# Altium PCB E17-15-Charge_Cart.PcbDoc
Units mil, origin at the board's own origin, x right, y up, seen from the top; angles counter-clockwise.
Board outline 3970 x 3255 mil, 2 copper layers (Top Layer, Bottom Layer); 47 components, 42 nets, 237 pads, 4 vias.
Unrouted connection lines stored in the file: 119.
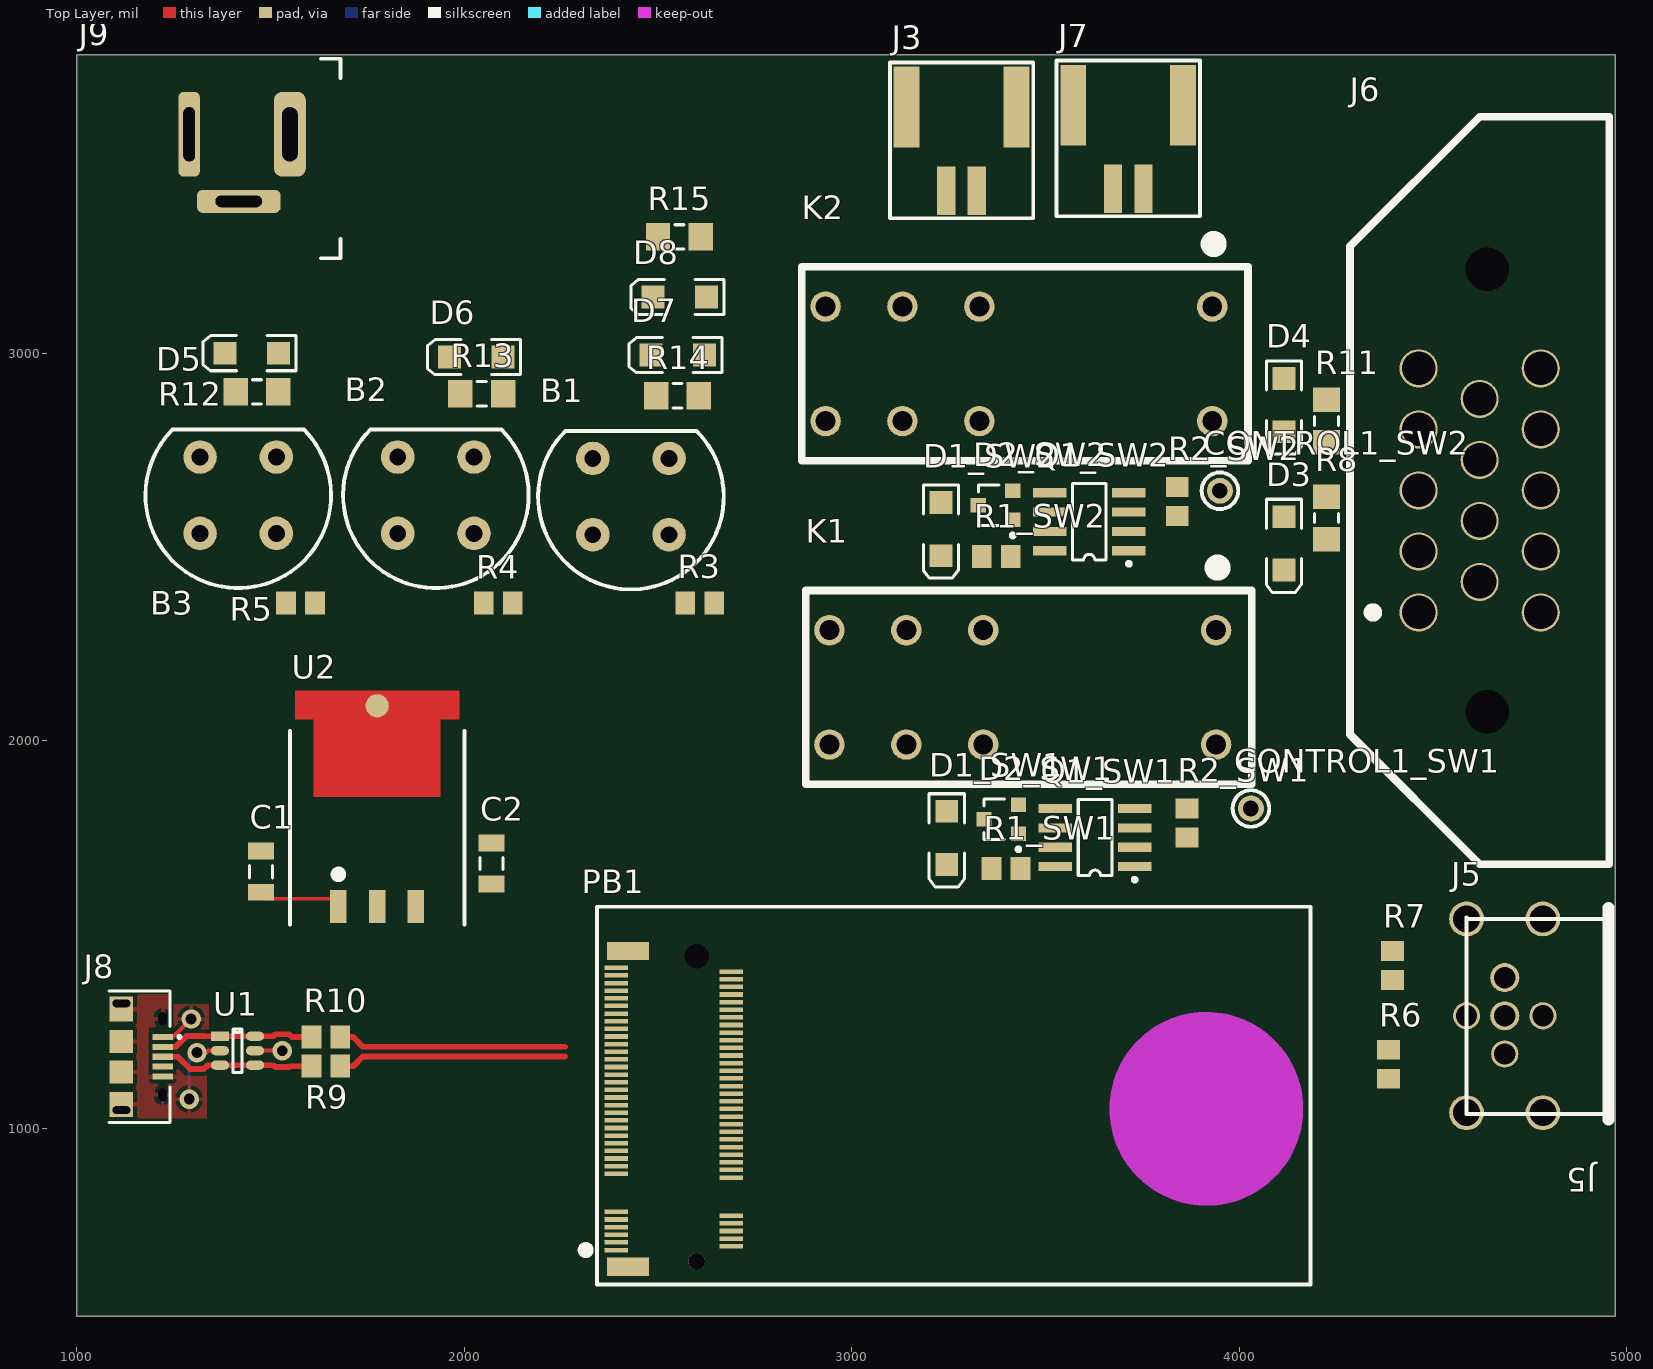
[diagram p0: Top Layer view]
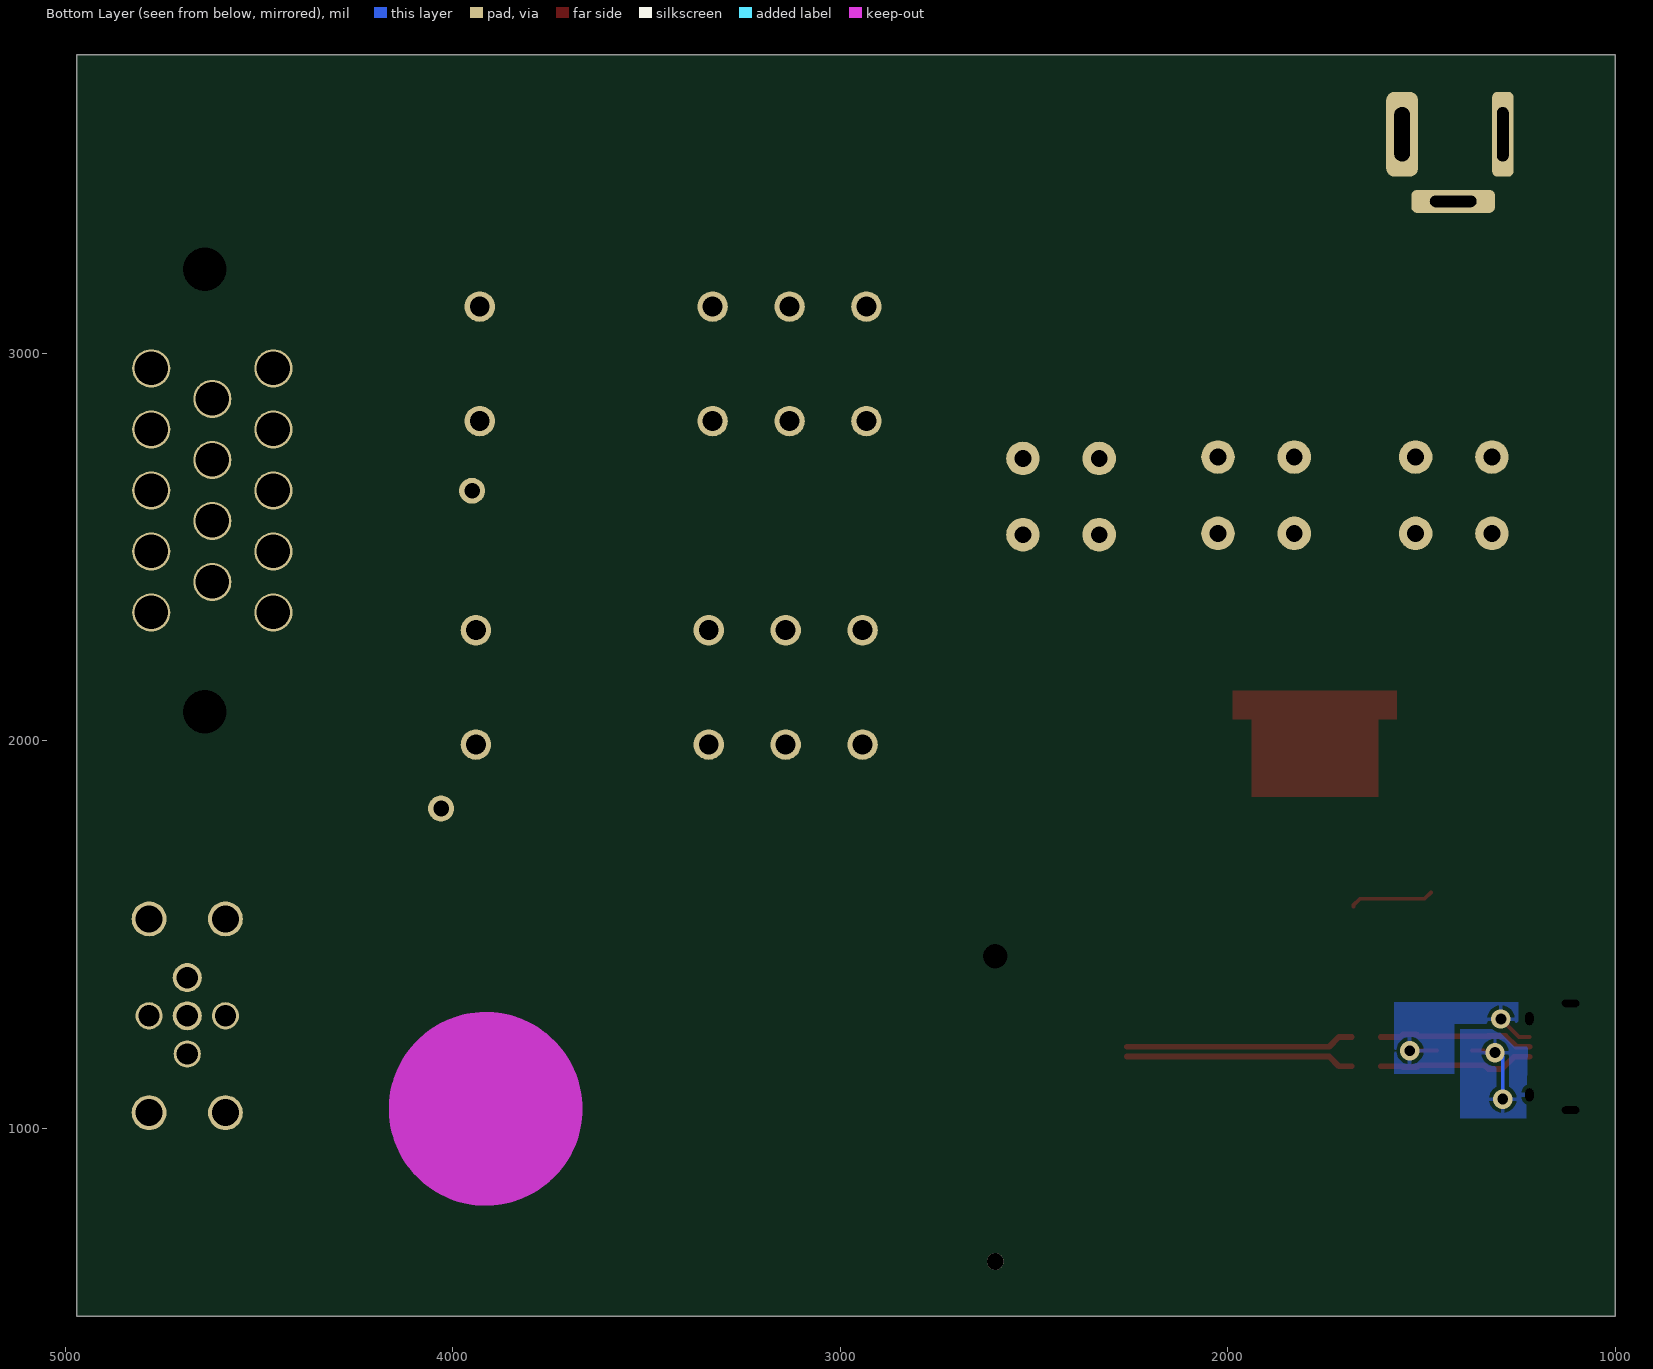
[diagram p1: Bottom Layer view, seen from below]

## Layer stack, top to bottom
Top Solder: solder mask 0.4, Solder Resist, Dk 3.5
Top Layer: signal copper 1.4
Dielectric 1: dielectric 12.6, FR-4, Dk 4.8
Bottom Layer: signal copper 1.4
Bottom Solder: solder mask 0.4, Solder Resist, Dk 3.5

## Board outline
1000,515 4970,515 4970,3770 1000,3770

## Design rules (kind name [scope] priority, off if disabled: settings)
Clearance [All] p1: gap=10 ignorepadtopadclearanceinfootprint=FALSE except(0: Arc-Hole Track-Hole SMDPad-Hole THPad-Hole Via-Hole Fill-Hole Poly-Hole Region-Hole Text-Hole)
DiffPairsRouting [All] p1: maxlimit=10 minlimit=10 mostfreqgap=10 toplayer_minwidth=15 toplayer_maxwidth=15 toplayer_prefwidth=15 bottomlayer_minwidth=15 bottomlayer_maxwidth=15 bottomlayer_prefwidth=15 maxuncoupledlength=500
PolygonConnect [All] p1: connectstyle=Relief reliefconductorwidth=10 reliefentries=4 polygonreliefangle="90 Angle" airgapwidth=10
RoomDefinition U_E17-15-POWER-DIST [InComponentClass('U_E17-15-POWER-DIST')] p1: confinementstyle=ConfineIn formatcopy=TRUE lockcomponents=FALSE outline 5015,8005 5635,8005 5635,9290 5015,9290
RoomDefinition TSAL_LED [InComponentClass('TSAL_LED')] p2: confinementstyle=ConfineIn formatcopy=TRUE lockcomponents=FALSE outline 5015,7595 5350,7595 5350,7955 5015,7955
RoomDefinition SW2 [InComponentClass('SW2')] p3: confinementstyle=ConfineIn formatcopy=TRUE lockcomponents=FALSE outline 1945,4022.4 4690,4022.4 4690,4442.4 1945,4442.4
RoomDefinition SW1 [InComponentClass('SW1')] p4: confinementstyle=ConfineIn formatcopy=TRUE lockcomponents=FALSE outline 5015,9345 7640,9345 7640,9765 5015,9765
RoomDefinition MCU [InComponentClass('MCU')] p5: confinementstyle=ConfineIn formatcopy=TRUE lockcomponents=FALSE outline 5015,5535 6420,5535 6420,7545 5015,7545
RoomDefinition IMD_LED [InComponentClass('IMD_LED')] p6: confinementstyle=ConfineIn formatcopy=TRUE lockcomponents=FALSE outline 5015,5125 5320,5125 5320,5485 5015,5485
RoomDefinition "Human Interface" [InComponentClass('Human Interface')] p7: confinementstyle=ConfineIn formatcopy=TRUE lockcomponents=FALSE outline 5015,4505 9140,4505 9140,5075 5015,5075
RoomDefinition CONN [InComponentClass('CONN')] p8: confinementstyle=ConfineIn formatcopy=TRUE lockcomponents=FALSE outline 5015,2395 10250,2395 10250,4455 5015,4455
RoomDefinition CH_SW [InComponentClass('CH_SW')] p9: confinementstyle=ConfineIn formatcopy=TRUE lockcomponents=FALSE outline 5015,1060 5635,1060 5635,2345 5015,2345
RoutingVias [All] p1: holewidth=28 width=50 viastyle="Through Hole" minholewidth=28 minwidth=50 maxholewidth=28 maxwidth=50
SolderMaskExpansion [All] p1: expansion=4
Width [All] p1: maxlimit=10 minlimit=10 preferedwidth=10
29 further rules are at their usual default settings.

## Classes and differential pairs
component class CH_SW: K1
component class CONN: C1 C2 J5 J6 J7 J8 J9 R6 R7 U1 U2
component class "Human Interface": B1 B2 B3 D5 D6 D7 D8 J3 R3 R4 R5 R12 R13 R14 R15
component class IMD_LED: D3 R8
component class MCU: PB1 R9 R10
component class SW1: CONTROL1_SW1 D1_SW1 D2_SW1 Q1_SW1 R1_SW1 R2_SW1
component class SW2: CONTROL1_SW2 D1_SW2 D2_SW2 Q1_SW2 R1_SW2 R2_SW2
component class TSAL_LED: D4 R11
component class U_E17-15-POWER-DIST: K2
channel class E17-04-INDUCTIVE_LOAD_SWITCH: SW1 SW2
differential pair USB_R: +USB_R_P -USB_R_N
differential pair CAN: +CAN_P -CAN_N
differential pair USB: +USB_P -USB_N

## Components (designator, comment, footprint, x,y, rotation, side; value= is the part's Value field where it differs from the comment)
B1 "MomentaryButton" MomentaryButton 2430,2630 r180 top
B2 "MomentaryButton" MomentaryButton 1926.57,2633.43 r180 top
B3 "MomentaryButton" MomentaryButton 1416.57,2633.43 r180 top
C1 "Cap Semi" C1206 1475,1661.85 r270 top value=470nF
C2 "Cap Semi" C1206 2070,1683.15 r270 top value=33uF
CONTROL1_SW1 "Test Point" "TEST POINT 5000K" 4030,1825 r90 top (schematic designator CONTROL1)
CONTROL1_SW2 "Test Point" "TEST POINT 5000K" 3950,2645 r90 top (schematic designator CONTROL1)
D1_SW1 "OVS5MBBCR4" OVS5MBBCR4 3245,1748.9 r270 top (schematic designator D1)
D1_SW2 "OVS5MBBCR4" OVS5MBBCR4 3230,2546.1 r270 top (schematic designator D1)
D2_SW1 "PMEG4010ET" SOT23-3 3385.71,1797.4 r90 top (schematic designator D2)
D2_SW2 "PMEG4010ET" SOT23-3 3370.71,2607.4 r90 top (schematic designator D2)
D3 "OVS5MBBCR4" OVS5MBBCR4 4115,2508.9 r270 top
D4 "OVS5MABCR4" OVS5MABCR4 4115,2866.1 r270 top
D5 "OVS5MABCR4" OVS5MABCR4 1451.1,3000 r180 top
D6 "OVS5MABCR4" OVS5MABCR4 2031.1,2990 r180 top
D7 "OVS5MABCR4" OVS5MABCR4 2551.1,2995 r180 top
D8 "OVS5MABCR4" OVS5MABCR4 2556.1,3145 r180 top
J3 "J_5023520200" MOLEX_DURACLIK_2 3283.27,3419.25 r0 top
J5 "MOLEX 84864-9003" "MOLEX 84864-9003" 4685,1290 r270 top
J6 "TE-776267-1" TE-776267-1 4462.83,2330.91 r90 top
J7 "J_5023520200" MOLEX_DURACLIK_2 3713.27,3424.25 r0 top
J8 "10118194-0001LF" 10118194-0001LF 1221.3,1184.37 r270 top
J9 "" EJ805A 1290,3565 r270 top
K1 "" TE-7-1393243-5 3940,1990 r180 top
K2 "TE-1393240-3" TE-7-1393243-5 3930,2825 r180 top
PB1 "ProcBoardRev2" PROC_BOARD 3081.03,685.51 r90 top
Q1_SW1 "DMS3015SSS" SOIC-8-150 3627.64,1750 r90 top (schematic designator Q1)
Q1_SW2 "DMS3015SSS" SOIC-8-150 3612.64,2565 r90 top (schematic designator Q1)
R1_SW1 "Res" 2012[0805] 3397.6,1670 r180 top value=1K (schematic designator R1)
R1_SW2 "Res" 2012[0805] 3372.6,2475 r180 top value=1K (schematic designator R1)
R2_SW1 "Res" 2012[0805] 3865,1787.4 r90 top value=10K (schematic designator R2)
R2_SW2 "Res" 2012[0805] 3840,2617.4 r90 top value=10K (schematic designator R2)
R3 "Res" 2012[0805] 2607.6,2355 r180 top value=1K
R4 "Res" 2012[0805] 2087.6,2355 r0 top value=1K
R5 "Res" 2012[0805] 1577.4,2355 r0 top value=1K
R6 "Res" 2012[0805] 4385,1165 r270 top value=1K
R7 "Res" 2012[0805] 4395,1420 r270 top value=0
R8 "Res" 3216[1206] 4225,2574.88 r90 top value=1K
R9 "Res" 2012[0805] 1642.6,1160 r180 top value=18
R10 "Res" 2012[0805] 1642.6,1235 r180 top value=18
R11 "Res" 3216[1206] 4225,2825.12 r90 top value=1K
R12 "Res" 3216[1206] 1464.88,2900 r0 top value=1K
R13 "Res" 3216[1206] 2044.88,2895 r0 top value=1K
R14 "Res" 3216[1206] 2550.12,2890 r0 top value=1K
R15 "Res" 3216[1206] 2555,3300 r0 top value=1K
U1 "" SOP6 1369.45,1237.4 r0 top
U2 "LM3940" TO-263-3 1775,2130 r270 top

## Footprints (in the part's own frame and the unit in brackets; to place one, negate y for a bottom-side part, rotate by r counter-clockwise, add the part's x,y. Pads: shape width x height; smd on the part's side, far side on the other; paste and mask are expansions set on the pad)
2012[0805] [mm] "Chip Resistor; Body 2.0 x 1.3 mm (LxW typ)"
  rect 1.3x1.5 smd: 1(-0.95,0) 2(0.95,0)
  body extent -0.97,-0.61 1.03,0.64, height 0.77
3216[1206] [mm] "Chip Resistor; Body 3.2 x 1.6 mm (LxW typ)"
  rect 1.6x1.8 smd: 1(-1.4,0) 2(1.4,0)
  silkscreen extent -0.3,-0.8 0.3,0.8, body extent -1.6,-0.79 1.6,0.81, height 1
10118194-0001LF [mm] "CONN USB MICRO B RECPT SMT R/A"
  rect 0.4x1.35 smd: 1(-1.3,0) 2(-0.65,0) 3(0,0) 4(0.65,0) 5(1.3,0)
  round 0 hole 0.5 slot 1.15 at 90 deg: 5(-3.5,-2.7) 5(3.5,-2.7)
  rect 1.645x1.55 smd: 5(-3.123,-2.7) 5(3.122,-2.7)
  round 0 hole 0.55 slot 0.85 at 0 deg: 5(-2.5,0) 5(2.5,0)
  rect 1.5x1.55 smd: 5(-1,-2.7) 5(1,-2.7)
  silkscreen extent -4.3,-3.5 4.3,1.2, body extent -4.02,-5.4 4.03,0.18, height 2.68
C1206 [mm] "Chip Capacitor, Body 3.2x1.6mm, IPC High Density"
  rect 1.1x1.7 smd: 1(-1.35,0) 2(1.35,0)
  silkscreen extent -0.4,-0.75 0.4,0.75, body extent -1.7,-0.9 1.7,0.9, height 1.3
EJ805A [mm] "CONN PWR JACK 2.1X5.5MM SOLDER"
  rrect50% 5.56x2.08 hole 1.02 slot 3.56 at 0 deg: 1(0,6.6)
  rrect50% 5.56x1.4 hole 0.76 slot 3.56 at 0 deg: 2(0,0)
  rrect50% 1.5x5.5 hole 0.76 slot 3.05 at 90 deg: 3(4.4,3.25)
  silkscreen extent -4.95,8.64 8.13,9.91, body extent -4.4,-7.49 7.37,9.27, height 10.85
"MOLEX 84864-9003" [mil]
  round 70 hole 55: 1(0,98.5) 3(0,-98.5) 4(98.5,0)
  round 75 hole 55: 2(-98.5,0) 5(0,0)
  round 90 hole 70: 6(250,98.5) 7(250,-98.5) 8(-250,98.5) 9(-250,-98.5)
  silkscreen extent -279,-99 268,268, body extent -299,-148 299,452, height 710
MOLEX_DURACLIK_2 [mm] "2 Positions Header, Shrouded Connector 0.079\" (2.00mm) Surface Mount, Right Angle Tin"
  rect 1.7x5.3 smd: 0(-3.6,5.48) 0(3.6,5.48)
  rect 1.2x3.2 smd: 1(-1,0) 2(1,0)
  silkscreen extent -4.7,-1.8 4.7,8.4, body extent -4,-0.89 4,8.51, height 6.38
MomentaryButton [mm]
  round 2.2 hole 1.1: 1(2.5,2.5) 2(2.5,-2.5) 3(-2.5,-2.5) 4(-2.5,2.5)
  silkscreen extent -6.08,-4.3 6.08,6.08, body extent -6,-5.4 6,6, height 14.3
OVS5MABCR4 [mm] "SMT LED; 2 Flat Leads; AMBER"
  rect 1.5x1.5 smd: 1(-1.75,0) 2(1.75,0)
  silkscreen extent -2.9,-1.15 3.2,1.15, body extent -1.75,-1.4 1.75,1.4, height 1.6
OVS5MBBCR4 [mm] "SMT LED; 2 Flat Leads; BLUE"
  rect 1.5x1.5 smd: 1(-1.75,0) 2(1.75,0)
  silkscreen extent -2.9,-1.15 3.2,1.15, body extent -1.75,-1.4 1.75,1.4, height 1.6
PROC_BOARD [mm]
  rect 1.2x2.75 smd: 0(-1.1,16.725) 0(19.6,16.725)
  round 1.1 hole 1.1 unplated paste+0: 0(-0.75,12.225)
  round 0 hole 6.35 unplated: 0(9.258,-21.183)
  round 1.524 hole 1.6 unplated: 0(19.25,12.225)
  rect 0.3x1.55 smd: 1(0,17.5) 2(0.25,9.95) 3(0.5,17.5) 4(0.75,9.95) 5(1,17.5) 6(1.25,9.95) 7(1.5,17.5) 8(1.75,9.95) 9(2,17.5) 10(2.25,9.95) 11(2.5,17.5) 12(4.75,9.95) 13(5,17.5) 14(5.25,9.95) 15(5.5,17.5) 16(5.75,9.95) 17(6,17.5) 18(6.25,9.95) 19(6.5,17.5) 20(6.75,9.95) 21(7,17.5) 22(7.25,9.95) 23(7.5,17.5) 24(7.75,9.95) 25(8,17.5) 26(8.25,9.95) 27(8.5,17.5) 28(8.75,9.95) 29(9,17.5) 30(9.25,9.95) 31(9.5,17.5) 32(9.75,9.95) 33(10,17.5) 34(10.25,9.95) 35(10.5,17.5) 36(10.75,9.95) 37(11,17.5) 38(11.25,9.95) 39(11.5,17.5) 40(11.75,9.95) 41(12,17.5) 42(12.25,9.95) 43(12.5,17.5) 44(12.75,9.95) 45(13,17.5) 46(13.25,9.95) 47(13.5,17.5) 48(13.75,9.95) 49(14,17.5) 50(14.25,9.95) 51(14.5,17.5) 52(14.75,9.95) 53(15,17.5) 54(15.25,9.95) 55(15.5,17.5) 56(15.75,9.95) 57(16,17.5) 58(16.25,9.95) 59(16.5,17.5) 60(16.75,9.95) 61(17,17.5) 62(17.25,9.95) 63(17.5,17.5) 64(17.75,9.95) 65(18,17.5) 66(18.25,9.95) 67(18.5,17.5)
  Keep-Out Layer circle w6.35: c9.258,-21.183 r3.175
  silkscreen extent -2.25,-28 22.5,19.75, body extent -1.7,-25.44 21.89,18.08, height 6.34
SOIC-8-150 [mm] "SOIC-8 150 mil package"
  rect 0.6x2.2 smd: 1(-1.905,-2.6) 2(-0.635,-2.6) 3(0.635,-2.6) 4(1.905,-2.6) 5(1.905,2.6) 6(0.635,2.6) 7(-0.635,2.6) 8(-1.905,2.6)
  silkscreen extent -2.88,-2.72 2.5,1.1, body extent -2.53,-3.12 2.47,3.08, height 1.72
SOP6 [mm]
  rect 1.2x0.6 smd: 1(0,0)
  oval 1.2x0.6 smd: 2(0,-0.95) 3(0,-1.9) 4(2.3,-1.9) 5(2.3,-0.95) 6(2.3,0)
  silkscreen extent 0.87,-2.37 1.43,0.48
SOT23-3 [mm] "SOT-23; 3 Leads; Body 3.0 x 2.5 mm, inc. leads (LxW max)"
  rect 0.95x1 smd: 1(-0.95,-1.125) 2(0.95,-1.125) 3(0,1.125)
  silkscreen extent -2.1,-1.25 1.32,1.12, body extent -1.52,-1.24 1.52,1.24, height 1.17
TE-7-1393243-5 [mm] "RELAY GEN PURPOSE DPDT 8A 110V"
  round 2 hole 1.3: 1(0,-7.5) 2(15.26,-7.5) 3(20.3,-7.5) 4(25.34,-7.5) 5(25.34,0) 6(20.3,0) 7(15.26,0) 8(0,0)
  silkscreen extent -2.35,-11.7 26.9,2.6, body extent -2.35,-10.1 26.65,2.6, height 15.7
TE-776267-1 [mm] "CONN HEADER 14POS R/A TIN BLK"
  round 0 hole 2.85 unplated: 0(-6.5,-4.5) 0(22.5,-4.5)
  round 2.5 hole 2.2: 1(0,0) 2(4,0) 3(8,0) 4(12,0) 5(16,0) 6(2,-4) 7(6,-4) 8(10,-4) 9(14,-4) 10(0,-8) 11(4,-8) 12(8,-8) 13(12,-8) 14(16,-8)
  silkscreen extent -16.5,-12.5 32.5,4.5, body extent -16.4,-35.8 32.4,2, height 27.77
"TEST POINT 5000K" [mm] "Test Point, 5000 Keystone Series, 0.040\" Hole"
  round 1.7 hole 1.02 mask+0.1: 1(0,0)
  silkscreen extent -1.2,-1.2 1.2,1.2
TO-263-3 [mm] "TO-263 3 Pin Package"
  rect 2.16x1.07 smd: 1(14.17,-2.54) 2(14.17,0) 3(14.17,2.54)
  round 1.524 smd: 4(1.016,0)
  Top Layer region: 1.91,-4.165 6.99,-4.165 6.99,4.165 1.91,4.165
  Top Layer region: 0,-5.4 1.91,-5.4 1.91,5.4 0,5.4
  silkscreen extent 2.67,-5.71 15.37,5.72, body extent 0,-5.08 14.35,5.08, height 4.57

## Part data
B1 B2 B3: DigiKey Part Number=401-1975-ND
C1 C2: "Capacitor (Semiconductor SIM Model)", LatestRevisionDate=29-May-2009, LatestRevisionNote="IPC-7351 Footprint Added.", PackageDescription="Chip Capacitor", PackageReference=C1206, Published=8-Jun-2000, Publisher="Altium Limited"
CONTROL1_SW1 CONTROL1_SW2: "5000-5004, 5015-5019 Keystone Electronics"
D1_SW1 D1_SW2 D3: "Typical BLUE LED", Colour=BLUE, PackageDocument=Feb-2002, Supplier Part Number 1=365-1544-1-ND, LatestRevisionDate=17-Jul-2002, LatestRevisionNote="Re-released for DXP Platform.", PackageReference=3.2X1.6X1.1, Published=8-Jun-2000, Publisher="Altium Limited", Supplier 1=Digi-Key
D2_SW1 D2_SW2: "SCHOTTKY RECT 40V 1A SOT-23", Supplier Part Number 1=568-4103-6-ND, Supplier 1=Digi-Key
D4 D5 D6 D7 D8: "Typical AMBER LED", Colour=AMBER, PackageDocument=Feb-2002, Supplier Part Number 1=365-1543-1-ND, LatestRevisionDate=17-Jul-2002, LatestRevisionNote="Re-released for DXP Platform.", PackageReference=3.2X1.6X1.1, Published=8-Jun-2000, Publisher="Altium Limited", Supplier 1=Digi-Key
J3 J7: "MOLEX DURACLIK 2-PIN RA", Supplier Part Number 1=5023520201-ND, Digikey_PN=WM7169CT-ND, Supplier 1=Digi-Key, Supplier 2=Digi-Key, Supplier Part Number 2=WM7169DKR-ND
J5: "CAN Micro-Change M12, Right Angle, Male"
J6: "CONN HEADER 14POS R/A TIN BLK", Supplier Part Number 1=A105104-ND, Supplier 1=Digi-Key
J8: "CONN USB MICRO B RECPT SMT R/A", Supplier Part Number 1=609-4618-1-ND, Supplier 1=Digi-Key
J9: library part EJ508A, "CONN PWR JACK 2.1X5.5MM SOLDER"
K1: library part TE-1393240-3, "RELAY GEN PURPOSE SPDT 16A 110V"
K2: "RELAY GEN PURPOSE SPDT 16A 110V"
PB1: "Processor board that carries the STM32F072RB"
Q1_SW1 Q1_SW2: "N-Channel Power MOSFET", Supplier Part Number 1=DMS3015SSS-13DICT-ND, Supplier 1=Digi-Key
R1_SW1 R1_SW2 R2_SW1 R2_SW2 R3 R4 R5 R6 R7 R8 R9 R10 R11 R12 R13 R14 R15: "Surface Mount Resistor", LatestRevisionDate=17-Jul-2002, LatestRevisionNote="Re-released for DXP Platform.", PackageReference=AXIAL-0.5, Published=8-Jun-2000, Publisher="Altium Limited"
U1: library part USBL6-2

## Via types
v1: diameter 50, hole 28, Top Layer to Bottom Layer, 4 vias

## Nets (pads, with @x,y where several pads share a name; then routed paths per layer and width w, separated by ;. In a path a pad name is that pad's centre, name@x,y a point inside that pad or via, vN(x,y) a via of type N, cw(c..) or ccw(c..) an arc to the next point about the centre after c; other vN are vias at no path point)
3.3V: C2.2 PB1.1 PB1.3 PB1.5 PB1.7 PB1.9 PB1.11 PB1.13 R3.2 R4.2 R5.2 U2.3
12V: J6.12 J6.14 J9.1
12V0: D1_SW2.1 D2_SW2.3 K2.2 K2.3 K2.4
CAN_N: J5.5 PB1.19 R6.1
CAN_P: J5.4 PB1.17 R6.2
GND: B1.1 B1.2 B2.1 B2.2 B3.1 B3.2 C1.1 C2.1 D5.2 D6.2 D7.2 D8.2 J5.3 J5.6 J5.7 J5.8 J5.9 J6.6 J6.11 J6.13 J8.5 J9.2 PB1.2 PB1.4 PB1.6 PB1.8 PB1.10 PB1.12 Q1_SW1.1 Q1_SW1.2 Q1_SW1.3 Q1_SW2.1 Q1_SW2.2 Q1_SW2.3 R2_SW1.1 R2_SW2.1 R7.1 U1.2 U2.2 U2.4 | length 225.5
  Top Layer w10: v1@1276.36,1061.36 v1(1290,1075) v1@1279.49,1075 ; v1(1310,1195) 1334.53,1195 1339.53,1200 U1.2
  Bottom Layer w10: v1(1290,1075) 1290,1185 1300,1195 v1(1310,1195)
IMD-LED+: J6.2 R8.1
IMD-LED-: D3.2 J6.1
IMD-SENSE-A: J6.8 J7.1
IMD-SENSE-B: J6.7 J7.2
NetB1_3: B1.3 B1.4 PB1.18 R3.1
NetB2_3: B2.3 B2.4 PB1.20 R4.1
NetB3_3: B3.3 B3.4 PB1.16 R5.1
NetCONTROL1_SW1_1: CONTROL1_SW1.1 PB1.47 Q1_SW1.4 R2_SW1.2
NetCONTROL1_SW2_1: CONTROL1_SW2.1 PB1.22 Q1_SW2.4 R2_SW2.2
NetD1_SW1_2: D1_SW1.2 R1_SW1.2
NetD1_SW2_2: D1_SW2.2 R1_SW2.2
NetD2_SW1_1: D2_SW1.1 K1.1 Q1_SW1.5 Q1_SW1.6 Q1_SW1.7 Q1_SW1.8 R1_SW1.1
NetD2_SW2_1: D2_SW2.1 K2.1 Q1_SW2.5 Q1_SW2.6 Q1_SW2.7 Q1_SW2.8 R1_SW2.1
NetD3_1: D3.1 R8.2
NetD4_1: D4.1 R11.2
NetD5_1: D5.1 R12.2
NetD6_1: D6.1 R13.2
NetD7_1: D7.1 R14.2
NetD8_1: D8.1 R15.2
NetJ5_1: J5.1 R7.2
NetJ6_9: J6.9 K1.3 K1.4
NetJ6_10: J6.10 K1.7 K1.8
NetPB1_48: PB1.48 R15.1
NetPB1_50: PB1.50 R14.1
NetPB1_52: PB1.52 R13.1
NetPB1_54: PB1.54 R12.1
SAFETY-LOOP-0: J3.1 K2.7 K2.8
SAFETY-LOOP-1: D1_SW1.1 D2_SW1.3 J3.2 J6.5 K1.2
TSAL-LED+: J6.3 R11.1
TSAL-LED-: D4.2 J6.4
USB_N: J8.2 R10.2 U1.1 U1.6 | length 400.6
  Top Layer w15: J8.2 1255.37,1209.96 1282.91,1237.5 1327.6,1237.5 1327.7,1237.4 1345.11,1237.4 1345.17,1237.46 1363.81,1237.46 1363.87,1237.4 U1.1 U1.6 1507.3,1237.4 1512.4,1242.5 1547.6,1242.5 1555.1,1235 R10.2
USB_P: J8.3 R9.2 U1.3 U1.4 | length 404.4
  Top Layer w15: J8.3 1260.53,1184.37 1292.4,1152.5 1327.6,1152.5 1337.7,1162.6 U1.3 U1.4 1507.3,1162.6 1512.4,1157.5 1547.6,1157.5 1550.1,1160 R9.2
USB_R_N: PB1.64 R10.1 | length 590.4
  Top Layer w15: R10.1 1713.09,1235 1738.09,1210 2260,1210
USB_R_P: PB1.62 R9.1 | length 590.4
  Top Layer w15: R9.1 1713.09,1160 1738.09,1185 2260,1185
V_CAN: J5.2
VUSB: C1.2 J8.1 U1.5 U2.1 | length 380.3
  Top Layer w10: J8.1 1248.63,1235.55 v1(1295,1281.92) ; U1.5 v1(1530,1200) ; C1.2 1491.65,1592.05 1658.94,1592.05 1675,1575.98 U2.1
pads on no net: D2_SW1.2 D2_SW2.2 J3.0 J6.0 J7.0 J8.4 J9.3 K1.5 K1.6 K2.5 K2.6 PB1.0 PB1.14 PB1.15 PB1.21 PB1.23 PB1.24 PB1.25 PB1.26 PB1.27 PB1.28 PB1.29 PB1.30 PB1.31 PB1.32 PB1.33 PB1.34 PB1.35 PB1.36 PB1.37 PB1.38 PB1.39 PB1.40 PB1.41 PB1.42 PB1.43 PB1.44 PB1.45 PB1.46 PB1.49 PB1.51 PB1.53 PB1.55 PB1.56 PB1.57 PB1.58 PB1.59 PB1.60 PB1.61 PB1.63 PB1.65 PB1.66 PB1.67

## Polygon pours and split planes (outlines as drawn)
GND on Top Layer "GND_L01_P008" (solid, remove dead copper, pour order 8): 1225,1025 1335,1025 1335,1135 1280,1135 1255,1160 1225,1160
GND on Top Layer "GND_L01_P004" (solid, remove dead copper, pour order 4): 1080,1345 1080,1025 1230,1025 1250,1045 1250,1145 1185,1145 1185,1260 1245,1260 1240,1265 1240,1345
VUSB on Top Layer "Top Layer-VUSB" (solid, pour order 0): 1250,1225 1270,1250 1340,1250 1340,1320 1265,1320 1250,1320 1250,1255
VUSB on Bottom Layer "Bottom Layer-VUSB" (solid, remove dead copper, pour order 2): 1570,1140 1415,1140 1415,1270 1255,1270 1250,1275 1250,1325 1570,1325
GND on Bottom Layer "GND_L02_P006" (solid, remove dead copper, pour order 6): 1230,1025 1400,1025 1400,1255 1305,1255 1260,1210 1225,1210